# EAGLE board vrx (EAGLE 8.3.2)
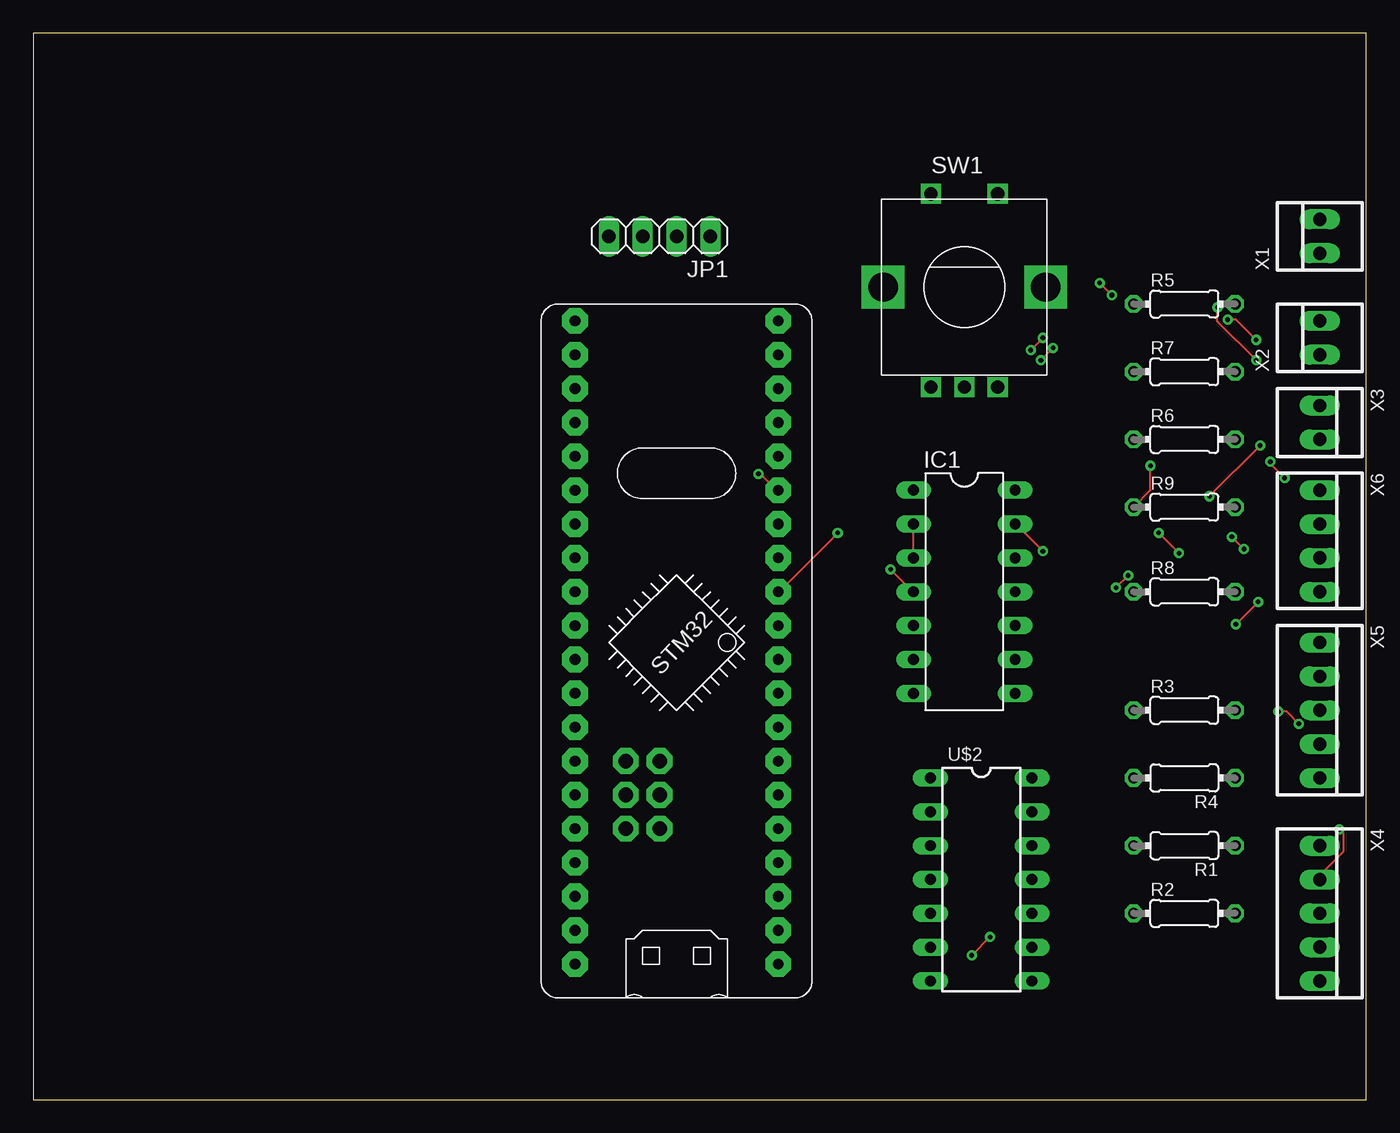
[diagram p0: board, top side]
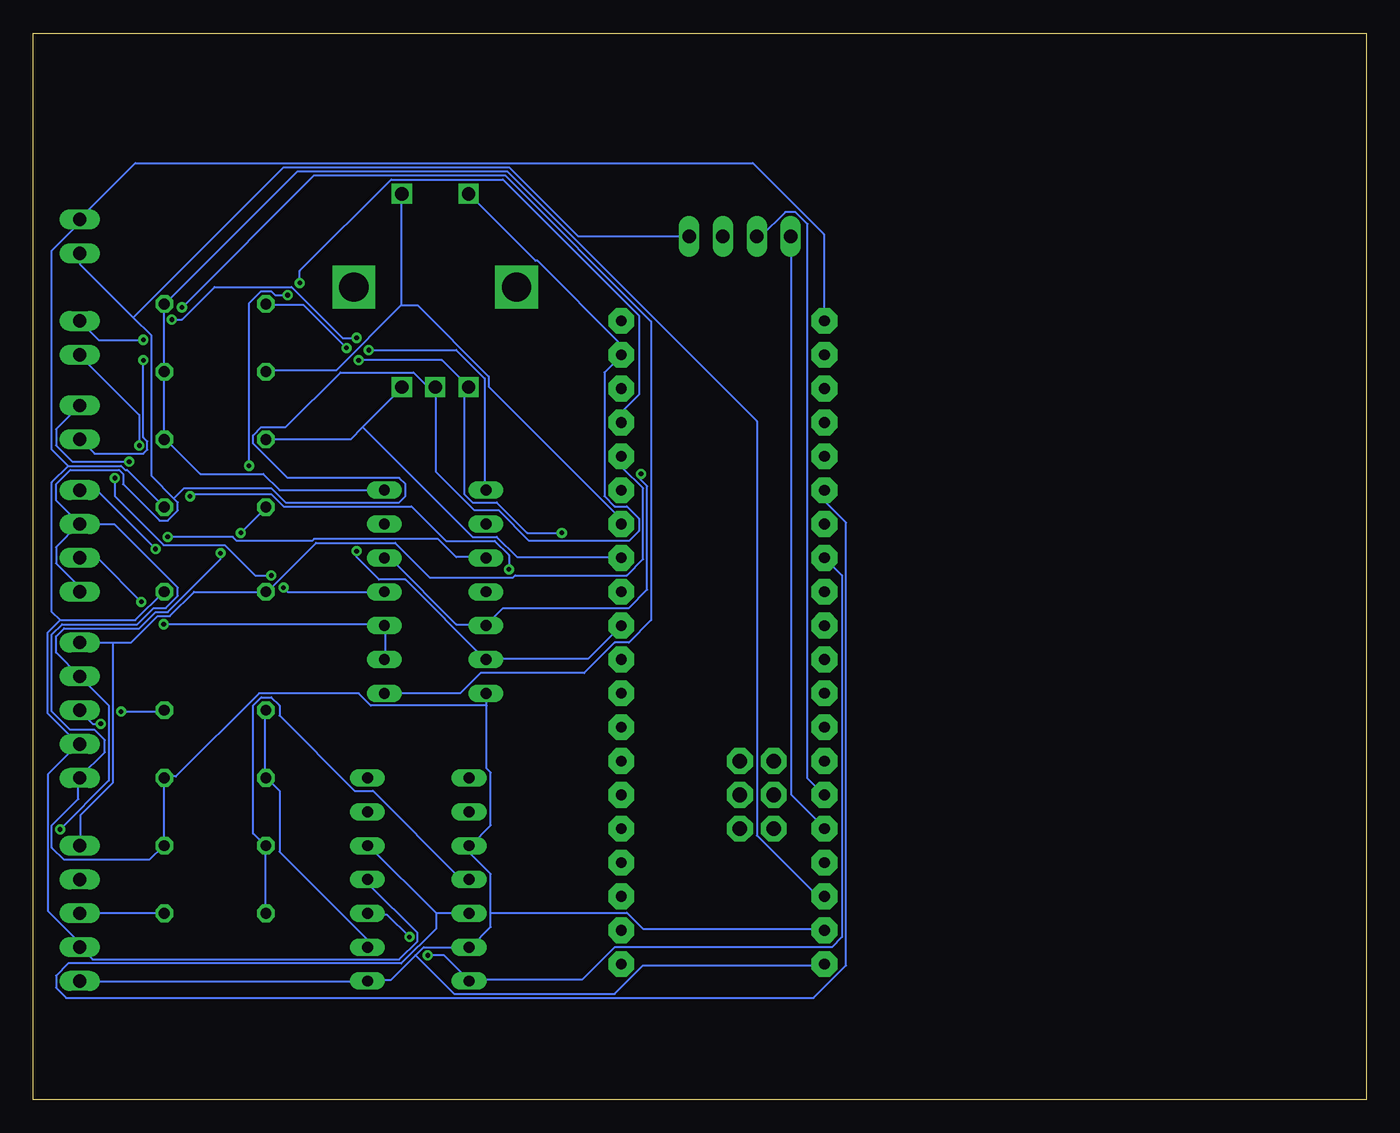
[diagram p1: board, bottom side, seen from below]

Size 100 x 80 mm. Coordinates in mm from the lower left corner, seen from the top.
Outline: 0,0 100,0 100,80 0,80 0,0
Copper layers (1*16): Top 0.035mm / dielectric 1.5mm / Bottom 0.035mm
Design rules "default": minimum track width 6mil, minimum drill 0.35mm, track to track 6mil, track to pad 6mil, pad to pad 6mil, via to via 6mil, smd to smd 6mil, copper to edge 40mil, drill to drill 6mil, minimum pad ring 10mil, minimum via ring 8mil, stop-mask expansion 4mil, vias tented up to drill 0mil, thermal gap 10mil

## Footprints (pad centres in the part's own frame; a part is rotated, then mirrored left to right if it is on the bottom)
DIL14 = drill 0.813 long: 1 -7.62,-3.81; 2 -5.08,-3.81; 3 -2.54,-3.81; 4 0,-3.81; 5 2.54,-3.81; 6 5.08,-3.81; 7 7.62,-3.81; 8 7.62,3.81; 9 5.08,3.81; 10 2.54,3.81; 11 0,3.81; 12 -2.54,3.81; 13 -5.08,3.81; 14 -7.62,3.81
1X04 = drill 1.016 long: 1 -3.81,0; 2 -1.27,0; 3 1.27,0; 4 3.81,0
0204/7 = drill 0.813 octagon: 1 -3.81,0; 2 3.81,0
ALPS_EC12E_SW = drill 1 square: A -2.5,-7.5; B 2.5,-7.5; C 0,-7.5; D -2.5,7; E 2.5,7 | drill 2.2 square: GND1 -6.1,0; GND2 6.1,0
BLUE_PILL_ADV = drill 0.8 pad 1.93 octagon: P$1 10.16,-30.48; P$2 10.16,-27.94; P$3 10.16,-25.4; P$4 10.16,-22.86; P$5 10.16,-20.32; P$6 10.16,-17.78; P$7 10.16,-15.24; P$8 10.16,-12.7; P$9 10.16,-10.16; P$10 10.16,-7.62; P$11 10.16,-5.08; P$12 10.16,-2.54; P$13 10.16,0; P$14 10.16,2.54; P$15 10.16,5.08; P$16 10.16,7.62; P$17 10.16,10.16; P$18 10.16,12.7; P$19 10.16,15.24; P$20 10.16,17.78; P$21 -5.08,-30.48; P$22 -5.08,-27.94; P$23 -5.08,-25.4; P$24 -5.08,-22.86; P$25 -5.08,-20.32; P$26 -5.08,-17.78; P$27 -5.08,-15.24; P$28 -5.08,-12.7; P$29 -5.08,-10.16; P$30 -5.08,-7.62; P$31 -5.08,-5.08; P$32 -5.08,-2.54; P$33 -5.08,0; P$34 -5.08,2.54; P$35 -5.08,5.08; P$36 -5.08,7.62; P$37 -5.08,10.16; P$38 -5.08,12.7; P$39 -5.08,15.24; P$40 -5.08,17.78 | drill 1.1 pad 1.93 octagon: P$42 -1.27,-20.32; P$43 -1.27,-17.78; P$44 -1.27,-15.24; P$45 1.27,-15.24; P$46 1.27,-17.78; P$47 1.27,-20.32
22-23-2021 = drill 1 long: 1 -1.27,0; 2 1.27,0
22-23-2051 = drill 1 long: 1 -5.08,0; 2 -2.54,0; 3 0,0; 4 2.54,0; 5 5.08,0
22-23-2041 = drill 1 long: 1 -3.81,0; 2 -1.27,0; 3 1.27,0; 4 3.81,0

## Placement (x,y rotation side)
IC1  4066N  [DIL14]  69.85,38.1 270 top
JP1  [1X04]  46.99,64.77 180 top
R1  330K  [0204/7]  86.36,19.05 180 top
R2  170k  [0204/7]  86.36,13.97 0 top
R3  170K  [0204/7]  86.36,29.21 0 top
R4  330K  [0204/7]  86.36,24.13 180 top
R5  170k  [0204/7]  86.36,59.69 0 top
R6  170k  [0204/7]  86.36,49.53 0 top
R7  170k  [0204/7]  86.36,54.61 0 top
R8  170k  [0204/7]  86.36,38.1 0 top
R9  170k  [0204/7]  86.36,44.45 0 top
SW1  EC12E_SW  [ALPS_EC12E_SW]  69.85,60.96 0 top
U$1  [BLUE_PILL_ADV]  45.72,40.64 0 top
U$2  LM319  [DIL14]  71.12,16.51 270 top
X1  22-23-2021  [22-23-2021]  96.52,64.77 90 top
X2  22-23-2021  [22-23-2021]  96.52,57.15 90 top
X3  22-23-2021  [22-23-2021]  96.52,50.8 270 top
X4  22-23-2051  [22-23-2051]  96.52,13.97 270 top
X5  22-23-2051  [22-23-2051]  96.52,29.21 270 top
X6  22-23-2041  [22-23-2041]  96.52,41.91 270 top

## Library data of the parts
IC1 = 40xx
JP1 = pinhead
R1-R9 = rcl
SW1 = switch-alps; MPN: EC12E2424407; OC_FARNELL: 1520813; OC_NEWARK: 74M1068
U$1 = BluePill
U$2 = op-amp
X1-X3 = con-molex; MF: MOLEX; MPN: 22-23-2021; OC_FARNELL: 1462926; OC_NEWARK: 25C3832
X4 X5 = con-molex; MF: MOLEX; MPN: 22-23-2051; OC_FARNELL: 1462952; OC_NEWARK: 38C9178
X6 = con-molex; MF: MOLEX; MPN: 22-23-2041; OC_FARNELL: 1462920; OC_NEWARK: 38C0355

## Nets
3.3V: JP1.2
5V: R8.2 R9.2 U$1.P$40 U$2.11 X1.2 X4.4 X5.4
GND: IC1.7 JP1.1 R1.1 R4.1 SW1.C SW1.D U$1.P$19 U$1.P$21 U$1.P$22 U$2.3 U$2.6 U$2.8 X1.1 X4.5 X5.5 X6.2 X6.4
I2C1_SCL: R8.1 U$1.P$16 X4.1 X5.1
I2C1_SDA: R9.1 U$1.P$17 X4.2 X5.2
I2C2_SCL: JP1.3 U$1.P$26
I2C2_SDA: JP1.4 U$1.P$25
N$1: IC1.2 IC1.3 X6.1
N$2: IC1.9 IC1.10 X6.3
N$5: IC1.1 X2.2
N$6: IC1.4 X2.1
N$7: IC1.8 X3.2
N$8: IC1.11 X3.1
PB3: IC1.6 IC1.13 U$1.P$11
PB4: R5.1 SW1.A U$1.P$12
PB5: R6.1 SW1.B U$1.P$13
PB6: R7.1 SW1.E U$1.P$14
PB7: IC1.5 IC1.12 U$1.P$15
RSSI1: U$1.P$35 U$2.5 U$2.12
RSSI1_IN: R2.2 X4.3
RSSI1_IN_: R1.2 R2.1 U$2.4
RSSI2: U$1.P$33 U$2.7 U$2.10
RSSI2_IN: R3.2 X5.3
RSSI2_IN_: R3.1 R4.2 U$2.9
VDD: IC1.14 R5.2 R6.2 R7.2 U$1.P$23

## Tracks (layer width: path | path; a pad name or v marks a point on that pad's centre or on a via)
5V
  Bottom 0.152: U$2.11 74.83,16.46 74.83,16.15 71.17,12.5 71.17,11.89 72.54,10.52 95.56,10.52 96.47,11.43 X4.4 96.62,11.43 96.62,11.89 98.91,14.17 98.91,24.38 96.62,26.67 | 97.99,35.97 92.35,35.97 90.22,38.1 R8.2 | 97.99,35.97 98.91,35.05 98.91,28.96 96.62,26.67 | R9.2 92.96,47.24 93.12,47.24 93.42,47.55 97.38,47.55 | 97.38,47.55 98.6,46.33 98.6,36.58 97.99,35.97 | 97.38,47.55 98.6,48.77 98.6,63.7 96.62,65.68 96.62,65.99 X1.2 96.47,66.14 92.35,70.26 46.02,70.26 40.69,64.92 40.69,58.52 U$1.P$40 | 96.62,26.67 X5.4
GND
  Bottom 0.152: SW1.D 67.21,67.82 62.33,62.94 62.18,62.94 55.93,56.69 55.93,55.93 U$1.P$19 55.93,55.78 57.15,54.56 57.15,45.26 56.39,44.5 55.47,44.5 54.56,43.59 54.56,42.67 55.32,41.91 62.79,41.91 65.08,44.2 66.9,44.2 69.8,47.09 69.8,53.34 SW1.C 69.95,53.49 70.41,53.49 71.48,54.56 76.96,54.56 81.08,50.44 82.91,50.44 83.52,49.84 83.52,49.23 80.92,46.63 72.54,46.63 72.08,46.18 72.08,45.26 72.54,44.81 81.08,44.81 82.14,45.87 88.7,45.87 89.46,45.11 | X6.4 96.62,38.1 96.62,38.56 98.3,40.23 98.3,41.45 96.62,43.13 X6.2 | 92.51,58.67 91.14,57.3 91.14,46.79 89.46,45.11 | 92.51,58.67 96.47,62.64 96.47,63.4 X1.1 | 89.46,45.11 89.15,44.81 89.15,44.2 89.92,43.43 90.53,43.43 93.27,46.18 93.27,46.94 93.57,47.24 97.23,47.24 98.3,46.18 98.3,44.96 X6.2 | JP1.1 59.13,64.77 64.31,69.95 81.23,69.95 92.51,58.67 | 90.22,19.05 90.22,24.08 R4.1 90.07,24.23 89.31,24.23 83.06,30.48 75.59,30.48 74.68,29.57 65.99,29.57 | 90.22,19.05 91.29,17.98 97.69,17.98 98.6,18.9 98.6,20.57 96.62,22.55 96.62,24.08 X5.5 96.47,24.23 94.64,26.06 94.64,26.98 95.4,27.74 97.23,27.74 98.6,29.11 98.6,34.9 97.84,35.66 92.2,35.66 90.98,36.88 90.07,36.88 89.15,37.8 89.15,38.41 93.88,43.13 96.47,43.13 X6.2 | 90.22,19.05 R1.1 | 71.32,10.82 73.15,8.99 74.83,8.99 U$2.8 74.98,8.84 96.47,8.84 X4.5 | 71.32,10.82 70.71,11.43 U$2.6 67.21,11.43 65.68,12.95 65.68,14.02 | 67.21,19.05 67.21,18.44 65.68,16.92 65.68,14.02 | 65.99,29.57 65.99,24.84 65.68,24.54 65.68,20.57 67.21,19.05 | 65.99,29.57 65.99,30.48 IC1.7 | 67.21,19.05 U$2.3 | 71.32,10.82 68.43,7.92 56.39,7.92 54.25,10.06 40.69,10.06 U$1.P$21 | 65.68,14.02 55.47,14.02 54.25,12.8 40.69,12.8 U$1.P$22
I2C1_SCL
  Bottom 0.152: X5.1 94.03,34.29 | 94.03,34.29 92.66,34.29 90.68,36.27 89.76,36.27 87.94,38.1 R8.1 82.45,38.1 78.79,41.76 72.85,41.76 70.26,39.17 64.01,39.17 63.86,39.32 55.47,39.32 54.25,40.54 54.25,45.87 55.78,47.4 55.78,48.16 U$1.P$16 | 94.03,34.29 94.03,23.77 96.47,21.34 96.47,19.05 X4.1
I2C1_SDA  (via drill 0.35)
  Top 0.152: v85.95,41 v84.43,42.52 | v97.99,20.27 98.3,19.96 98.3,18.59 96.62,16.92 96.62,16.61 X4.2 | v80.92,60.35 v80.01,61.27 | v83.82,47.55 83.82,45.72 R9.1
  Bottom 0.152: v84.43,42.52 82.6,44.35 R9.1 | v85.95,41 85.95,40.54 89.92,36.58 90.83,36.58 92.05,35.36 97.69,35.36 98.3,34.75 98.3,33.53 X5.2 94.34,29.57 94.34,23.93 v97.99,20.27 | v80.01,61.27 80.01,62.18 73.15,69.04 64.77,69.04 54.56,58.83 54.56,52.88 55.78,51.66 55.78,50.9 U$1.P$17 | v80.92,60.35 81.84,60.35 82.14,60.66 82.91,60.66 83.82,59.74 v83.82,47.55
I2C2_SCL
  Bottom 0.152: JP1.3 45.41,64.77 43.59,66.6 42.82,66.6 41.91,65.68 41.91,24.08 40.69,22.86 U$1.P$26
I2C2_SDA
  Bottom 0.152: JP1.4 43.13,64.77 43.13,22.86 40.69,20.42 U$1.P$25
N$1  (via drill 0.35)
  Top 0.152: IC1.3 65.99,40.69 65.99,43.13 IC1.2 | v89.92,42.22 v90.83,41.3
  Bottom 0.152: X6.1 95.25,45.72 v90.83,41.3 | v89.92,42.22 85.04,42.22 84.73,41.91 79.1,41.91 78.94,42.06 69.65,42.06 68.28,40.69 66.14,40.69 IC1.3
N$2  (via drill 0.35)
  Top 0.152: v90.22,35.66 v91.9,37.34
  Bottom 0.152: IC1.9 73.61,33.07 73.61,35.51 IC1.10 73.76,35.66 v90.22,35.66 | v91.9,37.34 95.1,40.54 96.47,40.54 X6.3
N$5  (via drill 0.35)
  Top 0.152: v75.74,57.15 v74.83,56.24 | v89.61,58.52 90.22,58.52 v91.75,57
  Bottom 0.152: v74.83,56.24 68.28,56.24 66.14,54.1 66.14,45.72 IC1.1 | v75.74,57.15 76.81,57.15 80.62,60.96 86.41,60.96 88.85,58.52 v89.61,58.52 | v91.75,57 95.1,57 X2.2
N$6  (via drill 0.35)
  Top 0.152: v64.31,39.78 65.99,38.1 IC1.4 | v92.05,49.07 v88.24,45.26
  Bottom 0.152: v64.31,39.78 64.31,40.84 65.38,41.91 69.04,41.91 71.63,44.5 81.23,44.5 82.14,45.41 88.09,45.41 v88.24,45.26 | v92.05,49.07 92.05,51.36 96.47,55.78 X2.1
N$7  (via drill 0.35)
  Top 0.152: v88.85,59.44 88.85,58.37 v91.75,55.47
  Bottom 0.152: IC1.8 67.97,30.48 66.45,32 58.67,32 56.39,34.29 55.32,34.29 53.65,35.97 53.65,58.37 64.62,69.34 78.94,69.34 v88.85,59.44 | v91.75,55.47 91.75,49.68 91.44,49.38 91.44,48.77 91.75,48.46 95.4,48.46 96.47,49.53 X3.2
N$8  (via drill 0.35)
  Top 0.152: v82.14,39.32 v81.23,38.41 | v93.88,46.63 92.81,47.7 v92.81,47.85
  Bottom 0.152: IC1.11 80.92,38.1 v81.23,38.41 | v82.14,39.32 83.36,39.32 85.65,41.6 90.22,41.6 93.88,45.26 v93.88,46.63 | v92.81,47.85 97.08,47.85 98.3,49.07 98.3,50.29 X3.1
PB3  (via drill 0.35)
  Top 0.152: v75.74,41.15 73.76,43.13 IC1.13
  Bottom 0.152: U$1.P$11 58.37,33.07 65.99,33.07 IC1.6 66.14,33.07 72.08,39.01 74.07,39.01 75.74,40.69 v75.74,41.15
PB4  (via drill 0.35)
  Top 0.152: v75.59,55.47 v76.5,56.39 | v60.35,42.52 55.93,38.1 U$1.P$12
  Bottom 0.152: v76.5,56.39 79.7,59.59 82.45,59.59 R5.1 | v75.59,55.47 69.34,55.47 67.36,53.49 SW1.A 67.36,53.34 67.67,53.03 67.67,45.41 67.06,44.81 65.23,44.81 62.94,42.52 v60.35,42.52
PB5
  Bottom 0.152: R6.1 76.2,49.53 75.29,50.44 | 75.29,50.44 72.39,53.34 SW1.B | 75.29,50.44 67.06,42.22 65.23,42.22 63.7,40.69 55.93,40.69 U$1.P$13
PB6
  Bottom 0.152: 72.39,59.59 77.27,54.71 82.45,54.71 R7.1 | 72.39,59.59 72.39,67.82 SW1.E | 72.39,59.59 71.17,59.59 65.84,54.25 65.84,53.49 55.93,43.59 55.93,43.28 U$1.P$14
PB7  (via drill 0.35)
  Top 0.152: v54.41,46.94 54.56,46.94 55.78,45.72 U$1.P$15
  Bottom 0.152: IC1.12 73.61,40.54 73.15,40.54 68.28,35.66 66.14,35.66 IC1.5 65.99,35.66 64.77,36.88 55.32,36.88 53.95,38.25 53.95,46.02 54.41,46.48 v54.41,46.94
RSSI1
  Bottom 0.152: 69.8,14.02 67.36,14.02 U$2.5 | 69.8,14.02 74.83,19.05 U$2.12 | 69.8,14.02 69.8,12.8 72.39,10.21 97.38,10.21 98.3,9.3 98.3,8.38 97.54,7.62 41.45,7.62 39.01,10.06 39.01,43.28 40.54,44.81 40.54,45.72 U$1.P$35
RSSI1_IN
  Bottom 0.152: R2.2 90.22,14.02 96.47,14.02 X4.3
RSSI1_IN_
  Bottom 0.152: 82.6,19.05 82.6,14.02 R2.1 | 82.6,19.05 83.52,19.96 83.52,29.57 82.91,30.18 82.14,30.18 81.53,29.57 81.53,28.8 75.89,23.16 74.52,23.16 67.97,16.61 67.36,16.61 U$2.4 | 82.6,19.05 R1.2
RSSI2  (via drill 0.35)
  Top 0.152: v70.41,10.82 v71.78,12.19
  Bottom 0.152: U$1.P$33 39.32,39.32 39.32,12.19 40.08,11.43 56.39,11.43 58.83,8.99 67.21,8.99 U$2.7 67.36,8.99 69.19,10.82 v70.41,10.82 | v71.78,12.19 73.46,13.87 74.83,13.87 U$2.10
RSSI2_IN  (via drill 0.35)
  Top 0.152: v93.42,29.11 94.03,29.11 v94.94,28.19
  Bottom 0.152: v93.42,29.11 90.22,29.11 R3.2 | v94.94,28.19 95.56,28.19 96.47,29.11 X5.3
RSSI2_IN_
  Bottom 0.152: U$2.9 74.98,11.43 74.98,12.04 81.53,18.59 81.53,23.16 82.45,24.08 R4.2 82.6,24.23 82.6,29.11 R3.1
VDD
  Bottom 0.152: IC1.14 81.53,45.72 82.75,46.94 87.48,46.94 90.07,49.53 R6.2 90.22,49.53 90.22,54.56 R7.2 90.22,54.71 90.22,59.59 R5.2 90.07,59.74 80.16,69.65 64.47,69.65 45.72,50.9 45.72,19.81 41.15,15.24 U$1.P$23